# Altium PCB ESP_Grow_Main_Rev_A.PcbDoc (part 2 of 2)
Units mil, origin at the board's own origin, x right, y up, seen from the top; angles counter-clockwise.
Board outline 3149.61 x 3149.61 mil, 4 copper layers (Top Copper, GND, Power, Bottom Copper), stack 61.811 mil thick; 66 components, 30 nets, 190 pads, 293 vias.
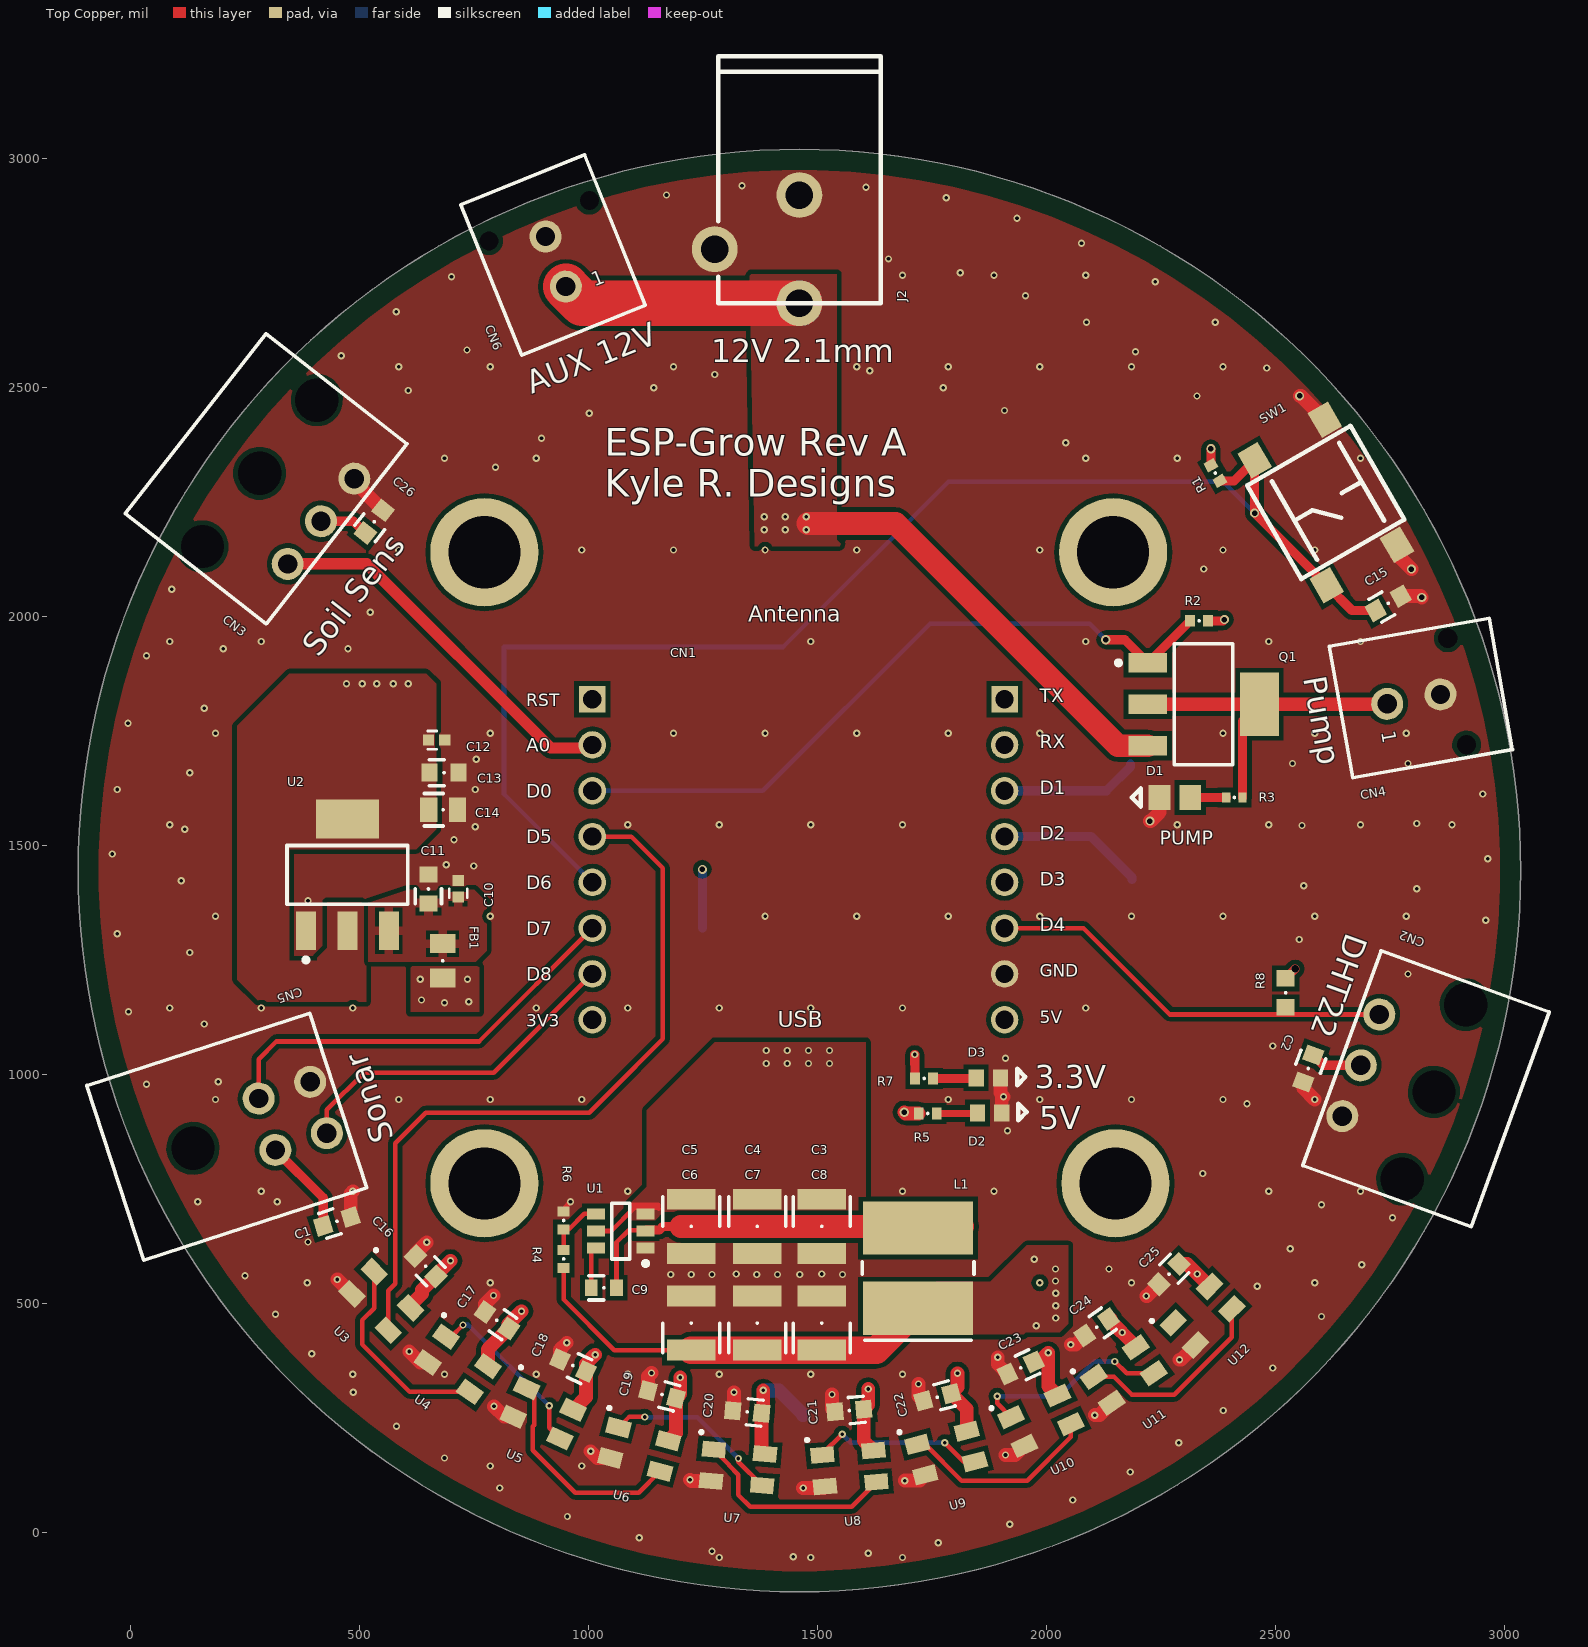
[diagram p0: Top Copper view]

## Silkscreen, mask and mechanical layers (free items; w line width, h text height) (continued)
Drill Drawing: (continued)
  lines w10: -532.71,5204.17 -516.04,5204.17 -499.38,5187.5 -482.71,5204.17 -466.04,5204.17 -482.71,5220.83 -466.04,5237.5 -482.71,5237.5 -499.38,5254.17 -516.04,5237.5 -532.71,5237.5 -516.04,5220.83 -532.71,5204.17 ; -532.71,5354.17 -516.04,5354.17 -516.04,5337.5 -482.71,5337.5 -482.71,5354.17 -466.04,5354.17 -466.04,5387.5 -482.71,5387.5 -482.71,5404.17 -516.04,5404.17 -516.04,5387.5 -532.71,5387.5 -532.71,5354.17 ; -532.71,5487.5 -466.04,5487.5 -466.04,5554.17 -532.71,5554.17 -532.71,5487.5 ; -532.71,5637.5 -499.38,5654.17 -466.04,5637.5 -482.71,5670.83 -466.04,5704.17 -499.38,5687.5 -532.71,5704.17 -516.04,5670.83 -532.71,5637.5 ; -532.71,5937.5 -532.71,5954.17 -516.04,5970.83 -532.71,5987.5 -532.71,6004.17 -516.04,6004.17 -499.38,5987.5 -482.71,6004.17 -466.04,6004.17 -466.04,5987.5 -482.71,5970.83 -466.04,5954.17 -466.04,5937.5 -482.71,5937.5 -499.38,5954.17 -516.04,5937.5 -532.71,5937.5 ; -532.71,6270.83 -499.38,6237.5 -466.04,6270.83 -499.38,6304.17 -532.71,6270.83 ; -532.71,6454.17 -466.04,6454.17 -499.38,6387.5 -532.71,6454.17 ; -532.71,6537.5 -466.04,6537.5 -466.04,6604.17 -532.71,6604.17 -532.71,6537.5 ; -519.38,6550.83 -479.38,6550.83 -479.38,6590.83 -519.38,6590.83 -519.38,6550.83
  lines w15: -592.5,5142.5 10468.41,5142.5 ; -592.5,6642.5 10468.41,6642.5 ; -41.62,4992.5 -41.62,6792.5 ; 548.22,4992.5 548.22,6792.5 ; 1697.88,4992.5 1697.88,6792.5 ; 2203.76,4992.5 2203.76,6792.5 ; 2937.56,4992.5 2937.56,6792.5 ; 4557.07,4992.5 4557.07,6792.5 ; 5146.92,4992.5 5146.92,6792.5 ; 5892.72,4992.5 5892.72,6792.5 ; 6902.43,4992.5 6902.43,6792.5 ; 7756.19,4992.5 7756.19,6792.5 ; 9089.8,4992.5 9089.8,6792.5 ; -592.5,4992.5 10468.41,4992.5 10468.41,6792.5 -592.5,6792.5 -592.5,4992.5
  text "Symbol" at -502.5,6687.5 h72
  text "Count" at 3.38,6687.5 h72
  text "Hole Size" at 593.22,6687.5 h72
  text "Plated" at 1742.88,6687.5 h72
  text "Hole Type" at 2248.76,6687.5 h72
  text "Drill Layer Pair" at 2982.56,6687.5 h72
  text "Via/Pad" at 4602.07,6687.5 h72
  text "Pad Shape" at 5191.92,6687.5 h72
  text "Template" at 5937.72,6687.5 h72
  text "Description" at 6947.43,6687.5 h72
  text "Hole Tolerance (+)" at 7801.19,6687.5 h72
  text "Hole Tolerance (-)" at 9134.8,6687.5 h72
  text "1" at 3.38,6537.5 h60
  text "0.406mm (16.00mil)" at 593.22,6537.5 h60
  text "PTH" at 1742.88,6537.5 h60
  text "Round" at 2248.76,6537.5 h60
  text "Top Copper - Bottom Copper" at 2982.56,6537.5 h60
  text "Via" at 4602.07,6537.5 h60
  text "Rounded" at 5191.92,6537.5 h60
  text "v41h41" at 5937.72,6537.5 h60
  text "1" at 3.38,6387.5 h60
  text "2.410mm (94.88mil)" at 593.22,6387.5 h60
  text "NPTH" at 1742.88,6387.5 h60
  text "Round" at 2248.76,6387.5 h60
  text "Top Copper - Bottom Copper" at 2982.56,6387.5 h60
  text "Pad" at 4602.07,6387.5 h60
  text "Rounded" at 5191.92,6387.5 h60
  text "c0hn241" at 5937.72,6387.5 h60
  text "3" at 3.38,6237.5 h60
  text "1.524mm (60.00mil)" at 593.22,6237.5 h60
  text "PTH" at 1742.88,6237.5 h60
  text "Round" at 2248.76,6237.5 h60
  text "Top Copper - Bottom Copper" at 2982.56,6237.5 h60
  text "Pad" at 4602.07,6237.5 h60
  text "Rounded" at 5191.92,6237.5 h60
  text "c254h152" at 5937.72,6237.5 h60
  text "4" at 3.38,6087.5 h60
  text "1.067mm (42.00mil)" at 593.22,6087.5 h60
  text "NPTH" at 1742.88,6087.5 h60
  text "Round" at 2248.76,6087.5 h60
  text "Top Copper - Bottom Copper" at 2982.56,6087.5 h60
  text "Pad" at 4602.07,6087.5 h60
  text "Rounded" at 5191.92,6087.5 h60
  text "c0hn107" at 5937.72,6087.5 h60
  text "4" at 3.38,5937.5 h60
  text "4.000mm (157.48mil)" at 593.22,5937.5 h60
  text "PTH" at 1742.88,5937.5 h60
  text "Round" at 2248.76,5937.5 h60
  text "Top Copper - Bottom Copper" at 2982.56,5937.5 h60
  text "Pad" at 4602.07,5937.5 h60
  text "Rounded" at 5191.92,5937.5 h60
  text "c600h400(Tol0-0)" at 5937.72,5937.5 h60
  text "0.000mm (0.00mil)" at 7801.19,5937.5 h60
  text "0.000mm (0.00mil)" at 9134.8,5937.5 h60
  text "6" at 3.38,5787.5 h60
  text "2.400mm (94.50mil)" at 593.22,5787.5 h60
  text "NPTH" at 1742.88,5787.5 h60
  text "Round" at 2248.76,5787.5 h60
  text "Top Copper - Bottom Copper" at 2982.56,5787.5 h60
  text "Pad" at 4602.07,5787.5 h60
  text "Rounded" at 5191.92,5787.5 h60
  text "c0hn240" at 5937.72,5787.5 h60
  text "10" at 3.38,5637.5 h60
  text "0.305mm (12.00mil)" at 593.22,5637.5 h60
  text "PTH" at 1742.88,5637.5 h60
  text "Round" at 2248.76,5637.5 h60
  text "Top Copper - Bottom Copper" at 2982.56,5637.5 h60
  text "Via" at 4602.07,5637.5 h60
  text "Rounded" at 5191.92,5637.5 h60
  text "v51h30" at 5937.72,5637.5 h60
  text "14" at 3.38,5487.5 h60
  text "1.067mm (42.00mil)" at 593.22,5487.5 h60
  text "PTH" at 1742.88,5487.5 h60
  text "Round" at 2248.76,5487.5 h60
  text "Top Copper - Bottom Copper" at 2982.56,5487.5 h60
  text "Pad" at 4602.07,5487.5 h60
  text "Rounded" at 5191.92,5487.5 h60
  text "c178h107" at 5937.72,5487.5 h60
  text "16" at 3.38,5337.5 h60
  text "1.016mm (40.00mil)" at 593.22,5337.5 h60
  text "PTH" at 1742.88,5337.5 h60
  text "Round" at 2248.76,5337.5 h60
  text "Top Copper - Bottom Copper" at 2982.56,5337.5 h60
  text "Pad" at 4602.07,5337.5 h60
  text "(Mixed)" at 5191.92,5337.5 h60
  text "(Mixed)" at 5937.72,5337.5 h60
  text "282" at 3.38,5187.5 h60
  text "0.203mm (8.00mil)" at 593.22,5187.5 h60
  text "PTH" at 1742.88,5187.5 h60
  text "Round" at 2248.76,5187.5 h60
  text "Top Copper - Bottom Copper" at 2982.56,5187.5 h60
  text "Via" at 4602.07,5187.5 h60
  text "Rounded" at 5191.92,5187.5 h60
  text "v41h20" at 5937.72,5187.5 h60
  text "341 Total" at 3.38,5037.5 h60

## Text inside footprints (layer, text, board x,y; h text height)
CN1: Top Overlay "D5" at 863.15,1504.29 h29.75; Top Overlay "D0" at 863.15,1604.29 h29.75; Top Overlay "3V3" at 863.15,1104.29 h27.2; Top Overlay "D8" at 863.15,1204.29 h29.75; Top Overlay "RST" at 863.15,1804.29 h27.2; Top Overlay "A0" at 863.15,1704.29 h29.75; Top Overlay "D6" at 863.15,1404.29 h29.75; Top Overlay "D7" at 863.15,1304.29 h29.75; Top Overlay "D2" at 1984.72,1512.16 h29.75; Top Overlay "D1" at 1984.72,1612.16 h29.75; Top Overlay "5V" at 1984.72,1112.16 h27.2; Top Overlay "TX" at 1984.72,1812.16 h29.75; Top Overlay "RX" at 1984.72,1712.16 h29.75; Top Overlay "D3" at 1984.72,1412.16 h29.75; Top Overlay "D4" at 1984.72,1312.16 h29.75; Top Overlay "GND" at 1984.72,1212.83 h27.2; Top Overlay "USB" at 1412.4,1102.36 h35.43; Top Overlay "Antenna" at 1347.95,1988.42 h35.43; Bottom Overlay "D2" at 2049.41,1512.16 h29.75; Bottom Overlay "GND" at 2049.41,1212.16 h27.2; Bottom Overlay "TX" at 2049.41,1812.16 h29.75; Bottom Overlay "RX" at 2049.41,1712.16 h29.75; Bottom Overlay "D3" at 2049.41,1412.16 h29.75; Bottom Overlay "D4" at 2049.41,1312.16 h29.75; Bottom Overlay "D1" at 2049.41,1612.16 h29.75; Bottom Overlay "5V" at 2049.41,1112.16 h27.2; Bottom Overlay "D5" at 913.77,1508.22 h29.75; Bottom Overlay "D0" at 913.77,1608.22 h29.75; Bottom Overlay "3V3" at 935.94,1108.22 h27.2; Bottom Overlay "D8" at 913.77,1208.22 h29.75; Bottom Overlay "RST" at 935.94,1808.22 h27.2; Bottom Overlay "A0" at 913.77,1708.22 h29.75; Bottom Overlay "D6" at 913.77,1408.22 h29.75; Bottom Overlay "D7" at 913.77,1308.22 h29.75
CN4: Top Overlay "1" at 2730.4,1746.8 h30 r280
CN6: Top Overlay "1" at 1013.6,2720.22 h30 r22